# EAGLE board ll-tester (EAGLE 9.6.2)
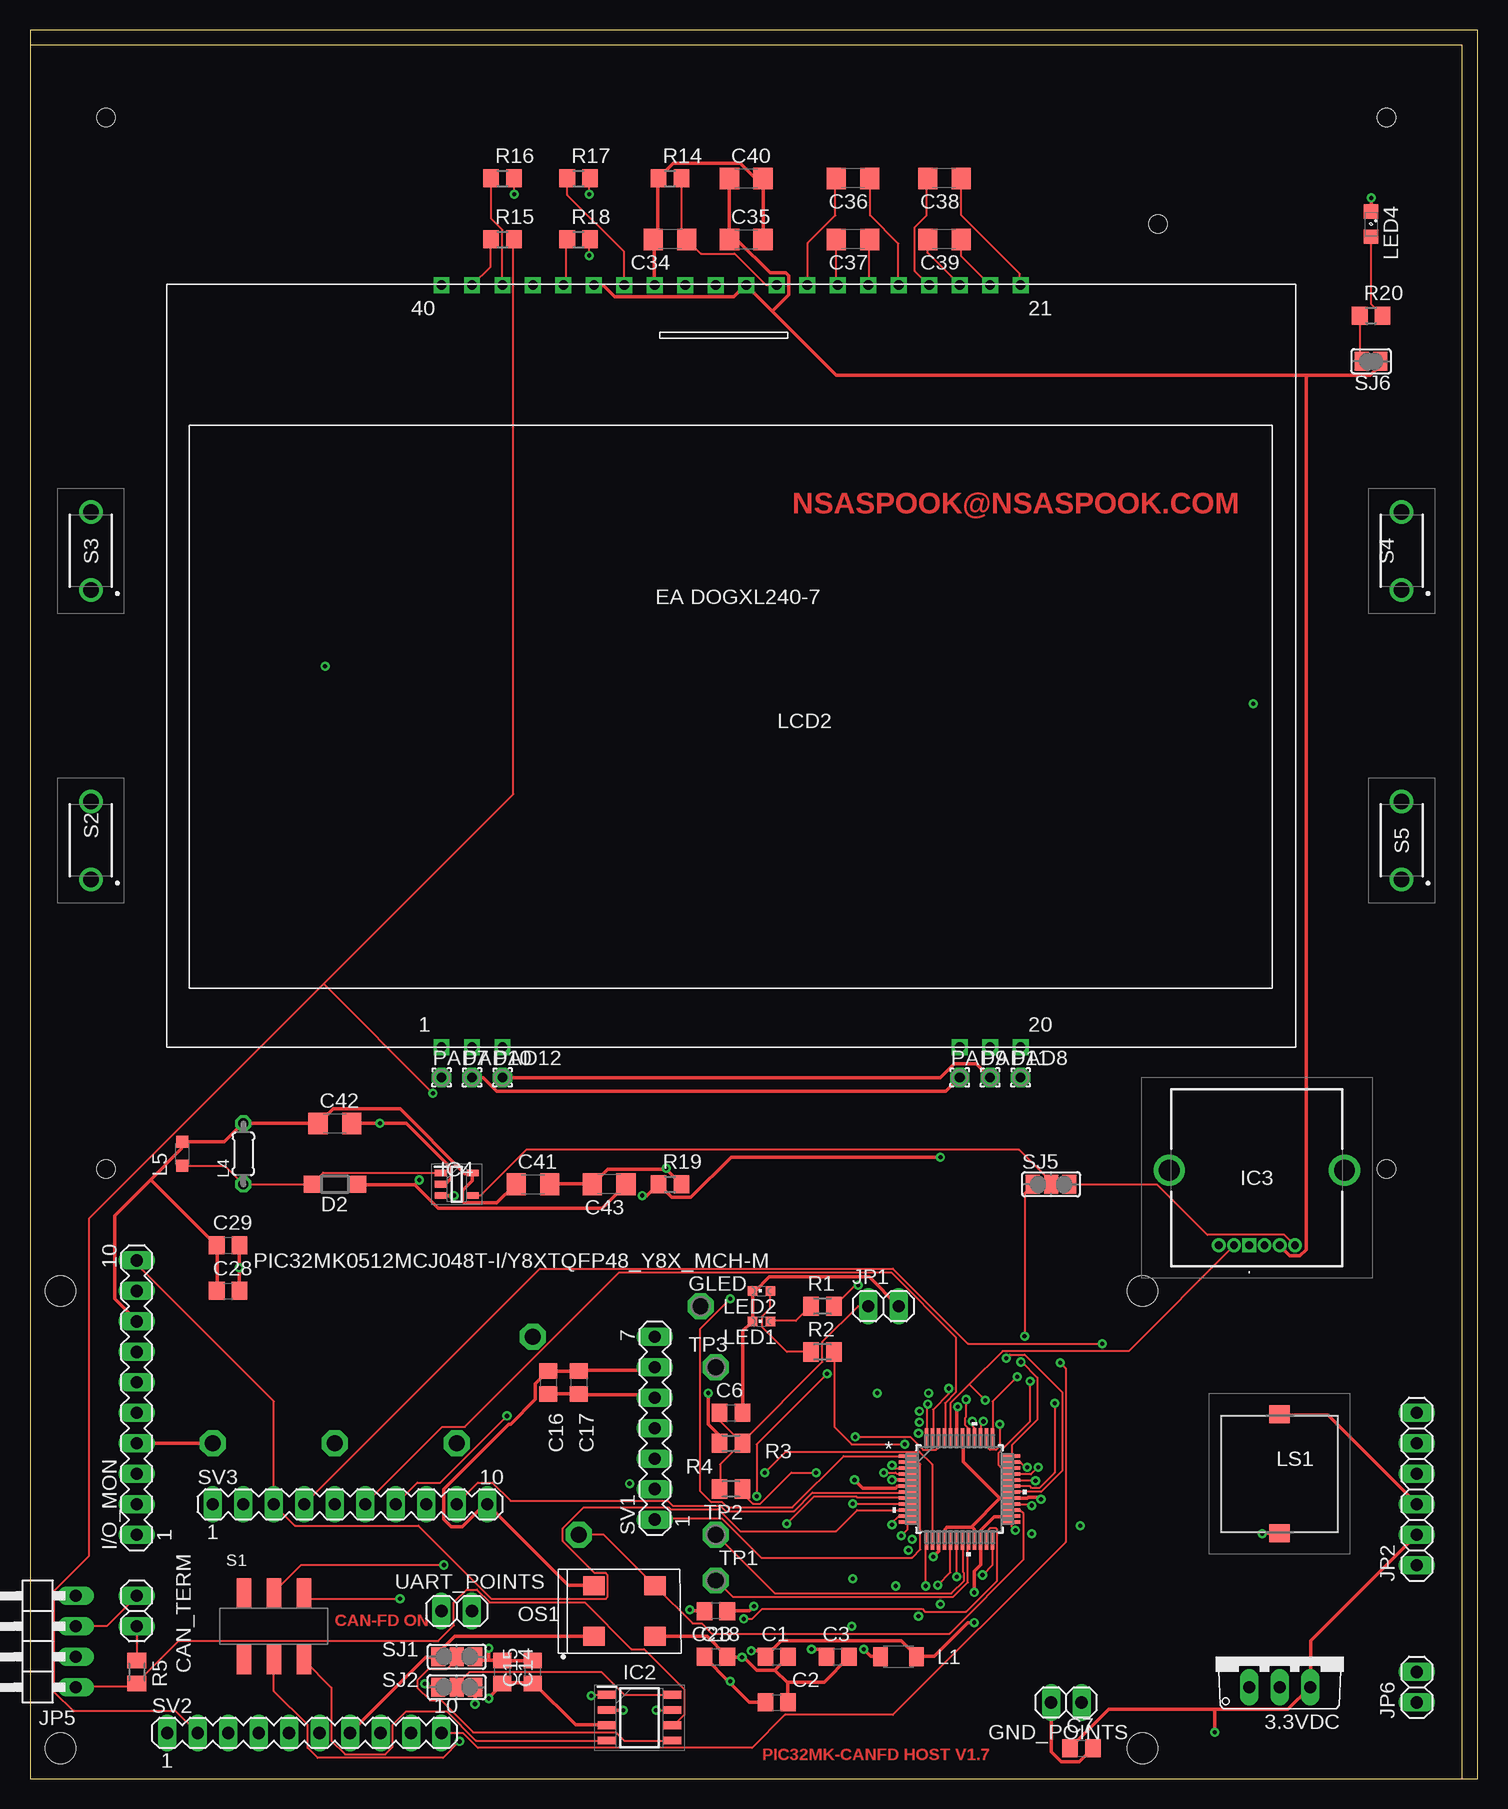
[diagram p0: board, top side]
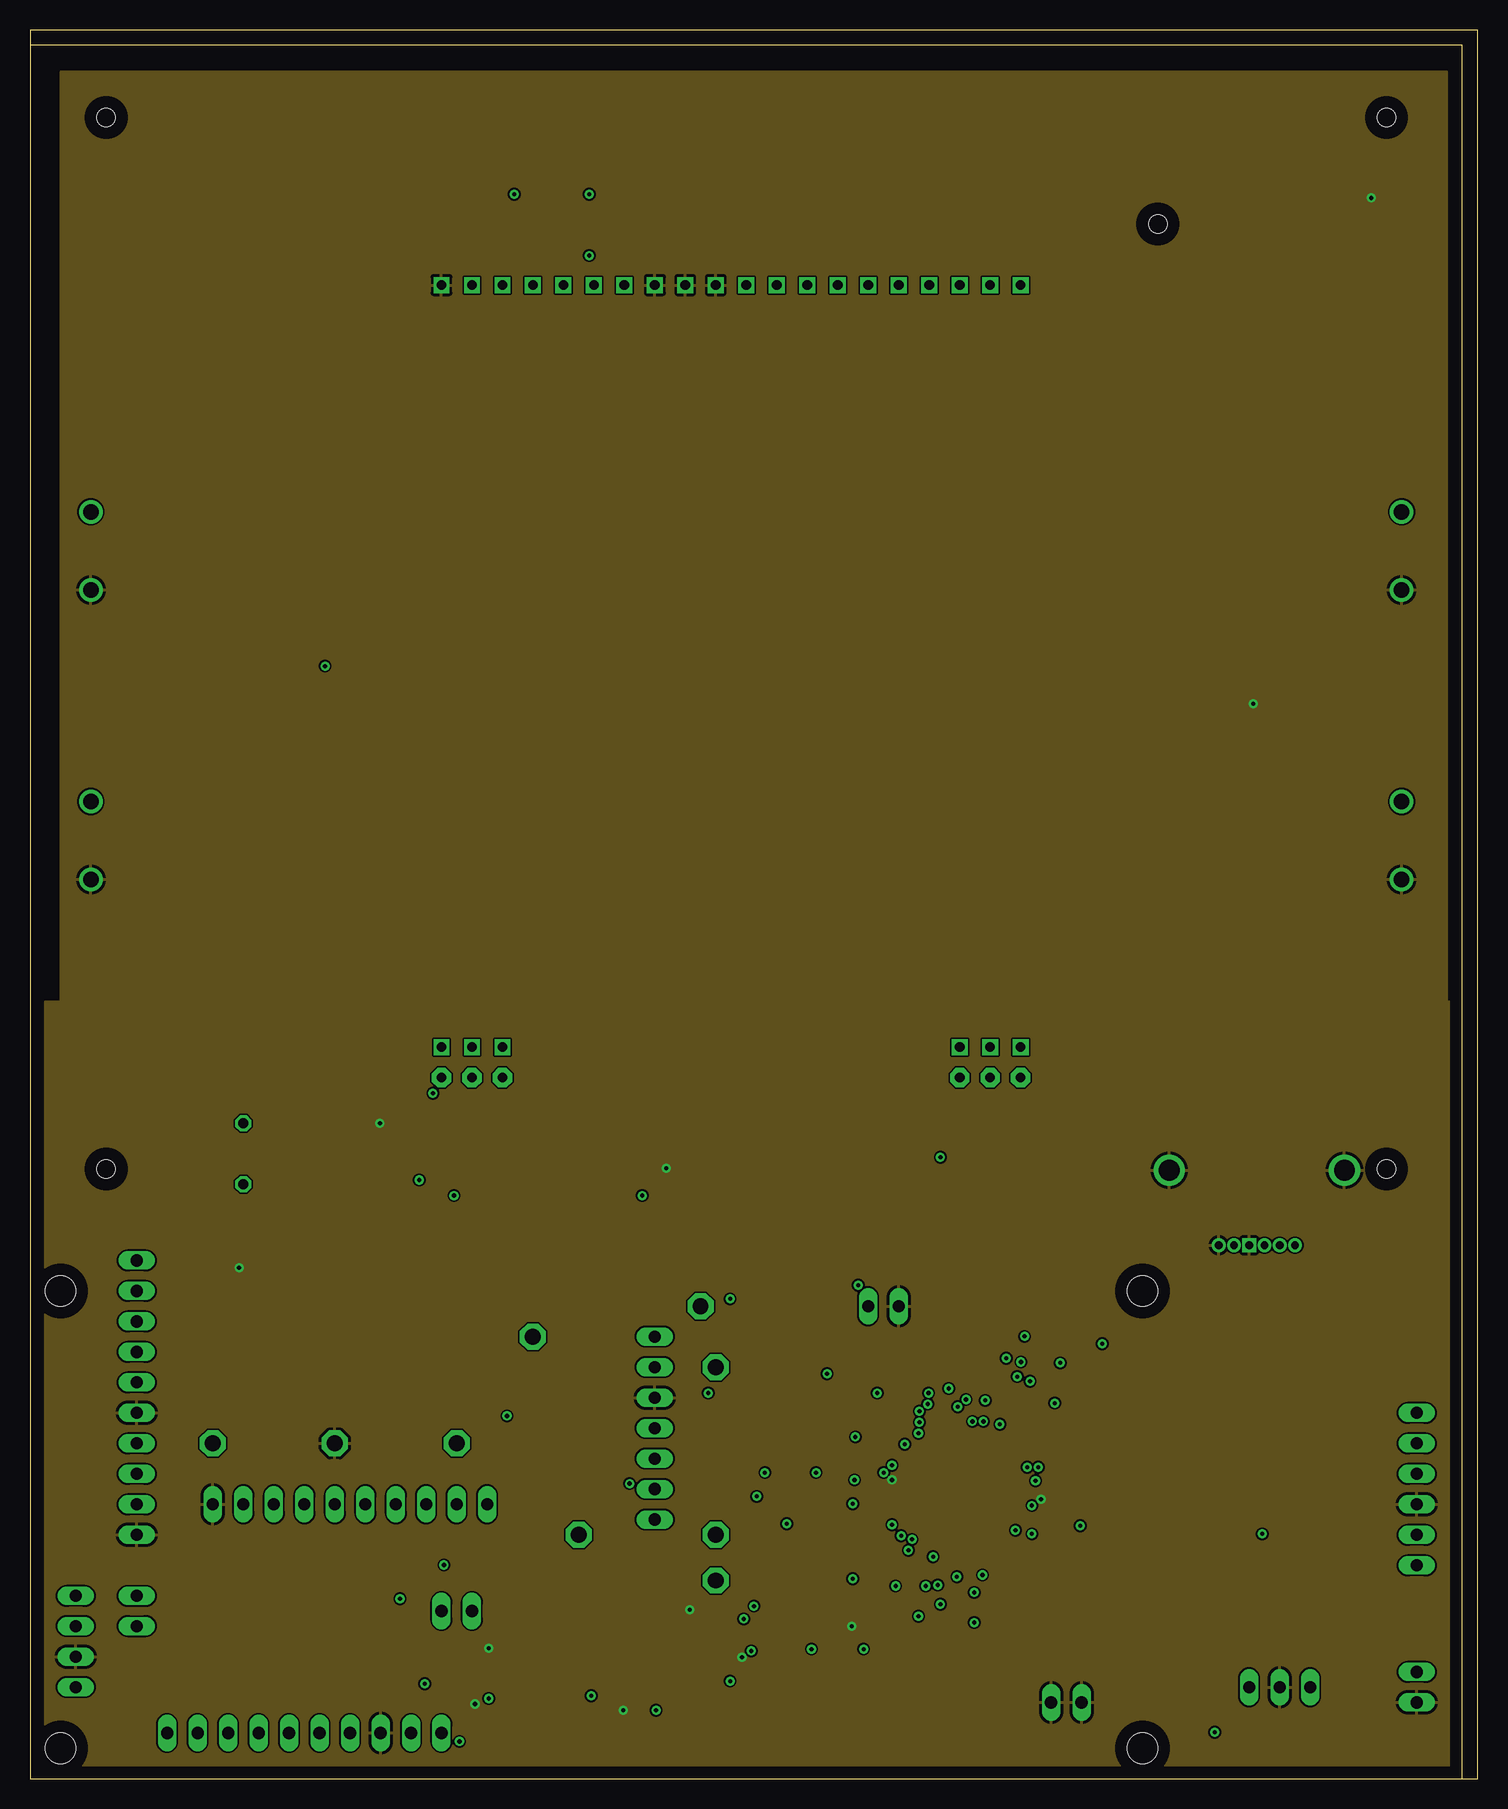
[diagram p1: board, inner layer Route2]
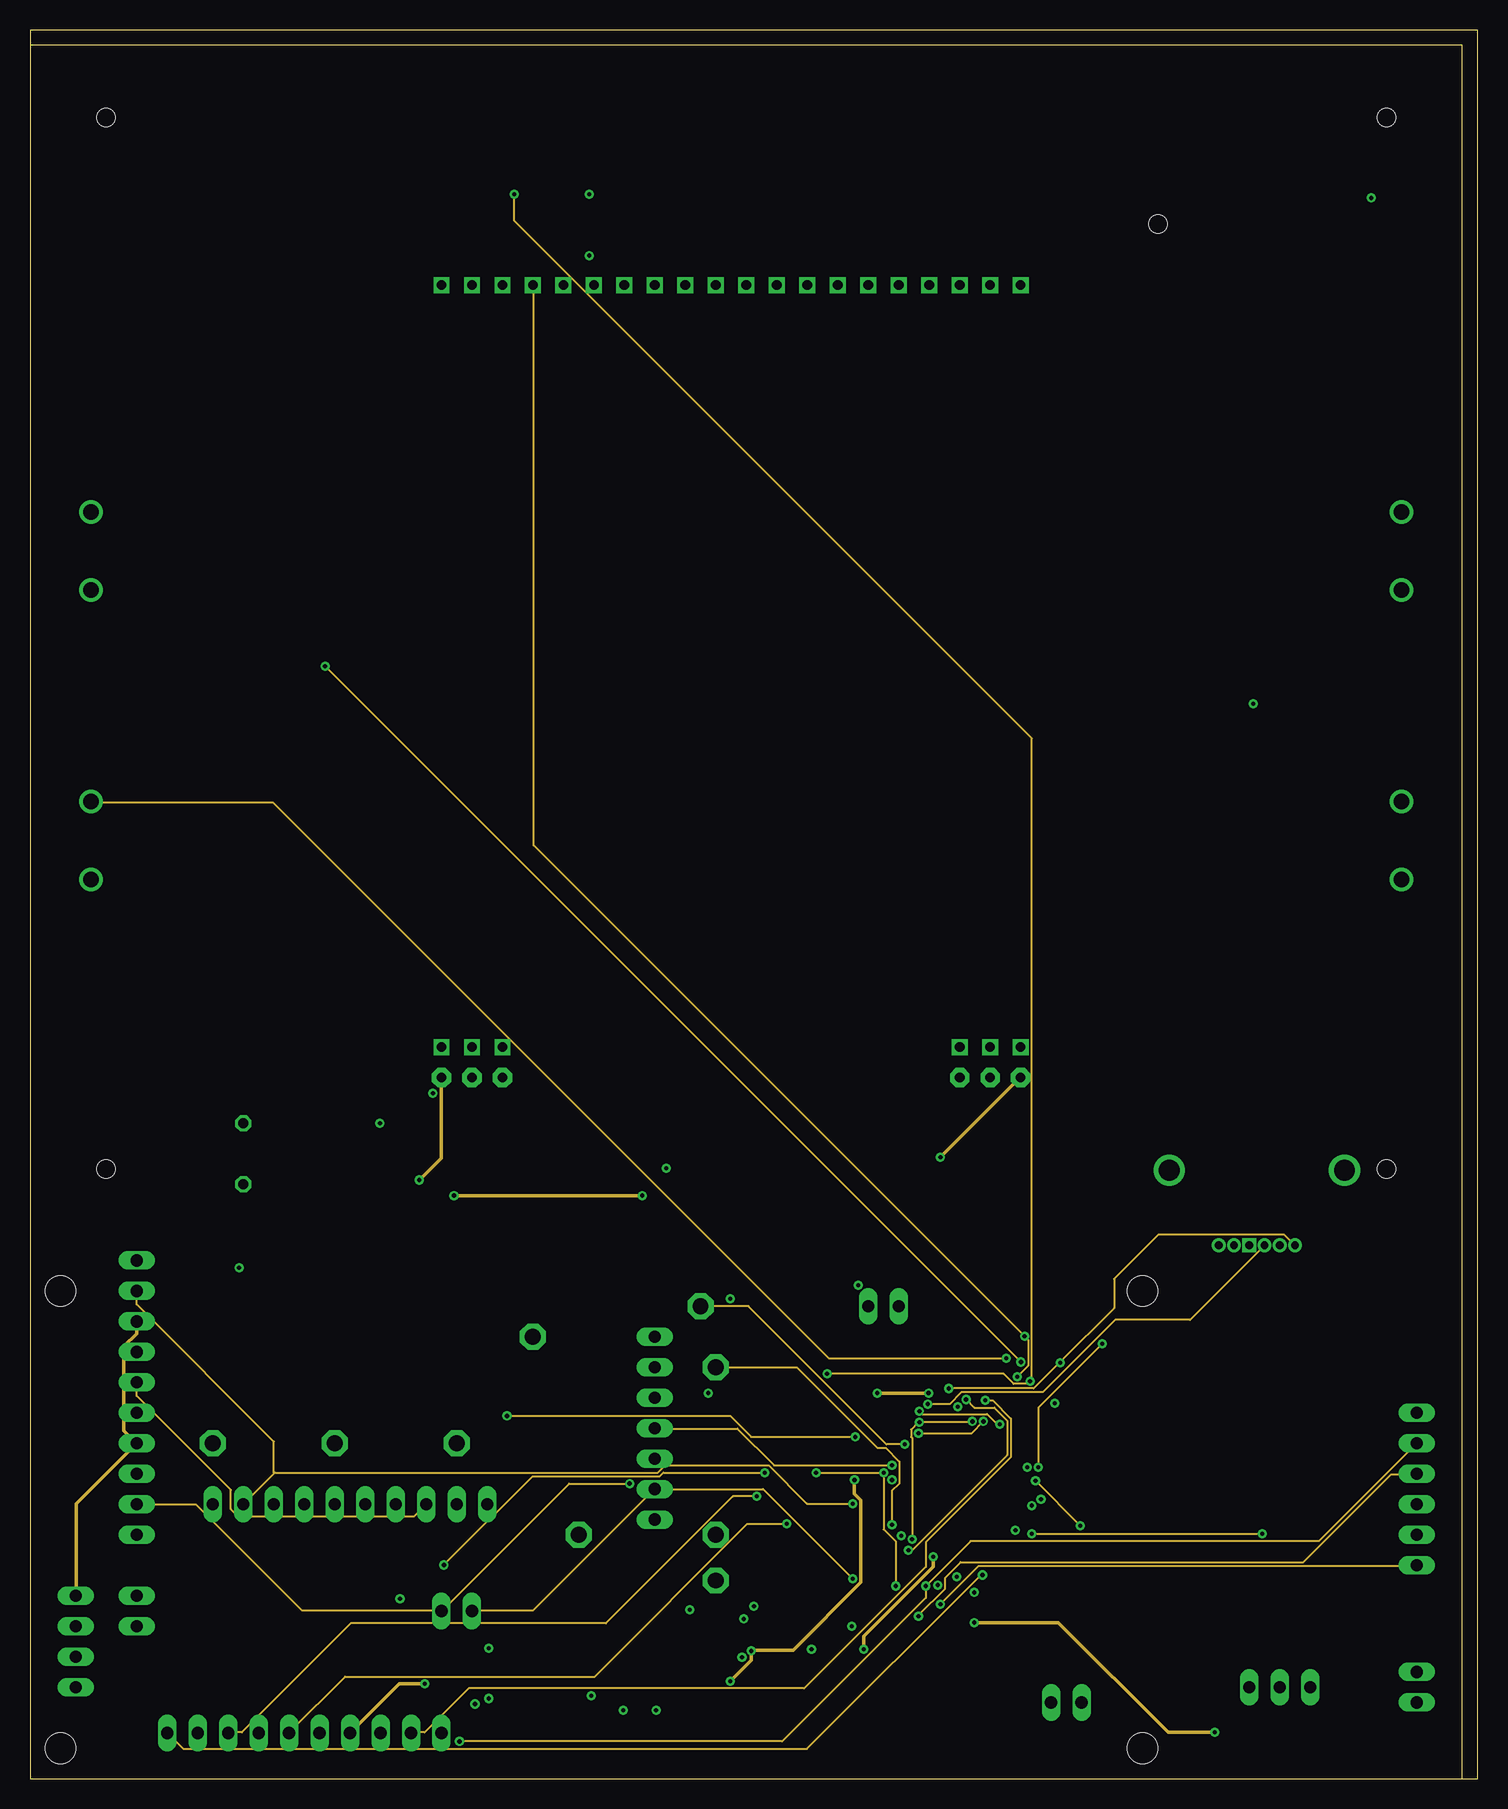
[diagram p2: board, inner layer Route15]
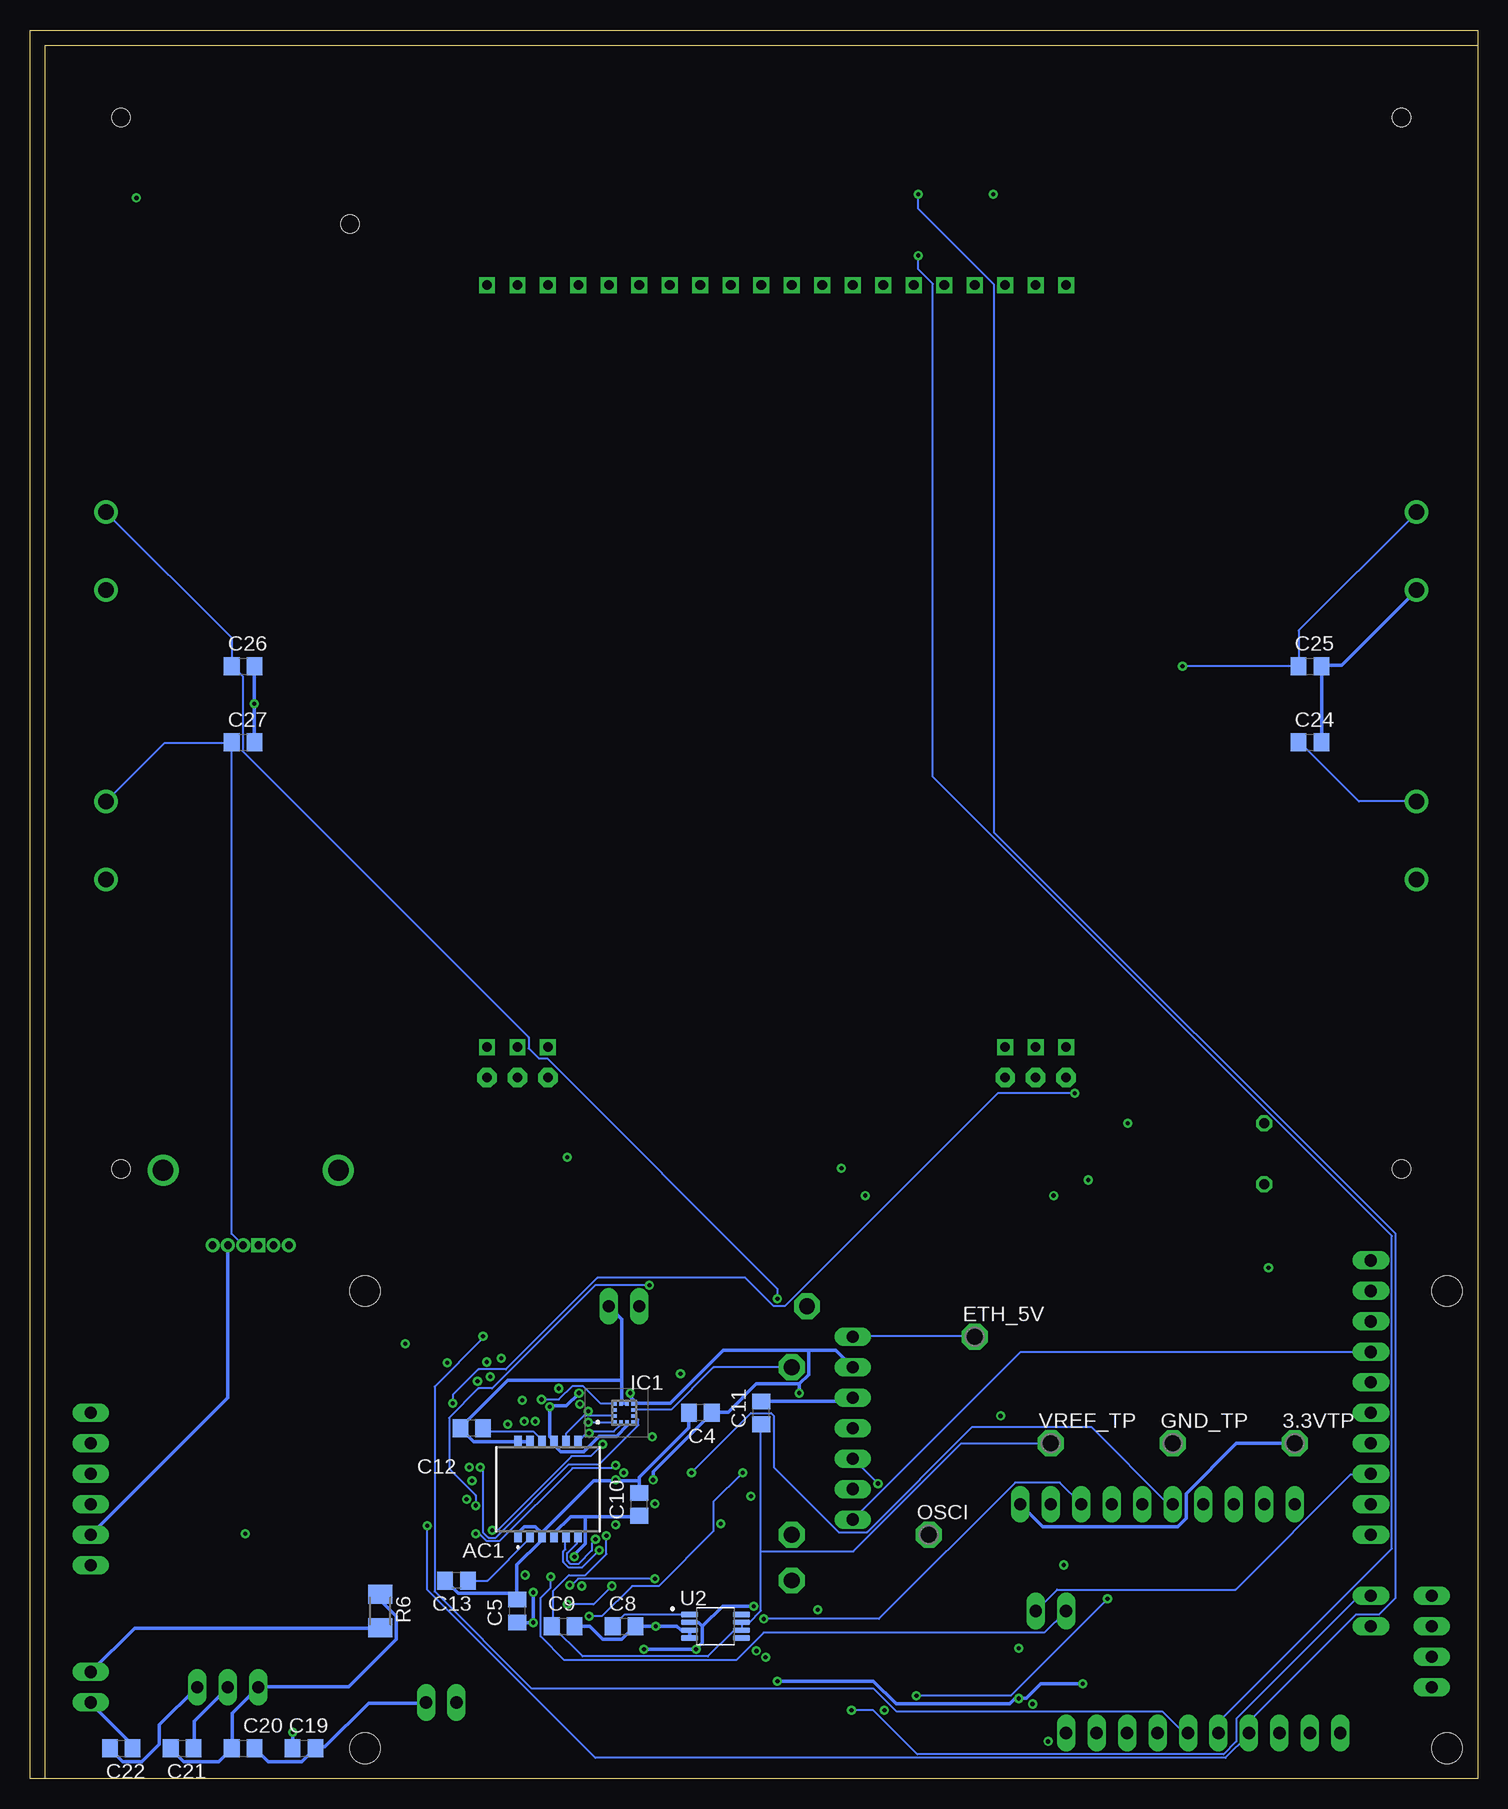
[diagram p3: board, bottom side, seen from below]

Size 120.63 x 145.72 mm. Coordinates in mm from the lower left corner, seen from the top.
Outline: 119.36,0 120.63,0 120.63,145.72 0,145.72 0,144.45
Outline: 119.36,0 0,0 0,144.45
Outline: 119.36,0 119.36,144.45 0,144.45
Copper layers (1+2*15+16): Top 0.035mm / dielectric 1.5mm / Route2 0.035mm / dielectric 0.15mm / Route15 0.035mm / dielectric 0.2mm / Bottom 0.035mm
Design rules "default *": minimum track width 6mil, minimum drill 0.35mm, track to track 6mil, track to pad 6mil, pad to pad 6mil, via to via 6mil, smd to smd 6mil, copper to edge 40mil, drill to drill 6mil, minimum pad ring 10mil, minimum via ring 8mil, stop-mask expansion 4mil, vias tented up to drill 0mil, thermal gap 10mil
Net classes: 1 icurrent: width 0.305 mm; 2 led: width 0.305 mm; 3 diff_can: width 0.051 mm
Holes 2.54 mm at 2.54,2.54 2.54,40.64 92.71,40.64 92.71,2.54
Holes 1.52 mm at 6.35,138.43 113.03,138.43 113.03,50.8 6.35,50.8 93.98,129.54
vRestrict: area 73.7,20.3 to 81.3,27.9; area 69.8,29.2 to 72.4,31.8; area 62.2,11.4 to 64.8,14; area 16.5,8.9 to 24.1,16.5

## Footprints (pad centres in the part's own frame; a part is rotated, then mirrored left to right if it is on the bottom)
TO220V = drill 1.016 long: 1 -2.54,-2.54; 2 0,-2.54; 3 2.54,-2.54
P1-13 = drill 1.321 pad 2.159 octagon: TP 0,0
SCA3300 = smd 0.61 x 0.98: 1 -2.5,-3.935; 2 -1.5,-3.935; 3 -0.5,-3.935; 4 0.5,-3.935; 5 1.5,-3.935; 6 2.5,-3.935; 7 2.5,3.935; 8 1.5,3.935; 9 0.5,3.935; 10 -0.5,3.935; 11 -1.5,3.935; 12 -2.5,3.935
C0805 = smd 1.3 x 1.5: 1 -0.95,0; 2 0.95,0
C1206 = smd 1.6 x 1.8: 1 -1.4,0; 2 1.4,0
1X02 = drill 1.016 long: 1 -1.27,0; 2 1.27,0
SOD123 = smd 1.4 x 1.4: A 1.9,0; C -1.9,0
MA10-1 = drill 1.016 long: 1 -11.43,0; 2 -8.89,0; 3 -6.35,0; 4 -3.81,0; 5 -1.27,0; 6 1.27,0; 7 3.81,0; 8 6.35,0; 9 8.89,0; 10 11.43,0
BMA490L = smd 0.3 x 0.35: 1 -0.75,-0.775; 2 -0.25,-0.775; 3 0.25,-0.775; 4 0.75,-0.775; 7 0.75,0.775; 8 0.25,0.775; 9 -0.25,0.775; 10 -0.75,0.775 | smd 0.35 x 0.3: 5 0.775,-0.25; 6 0.775,0.25; 11 -0.775,0.25; 12 -0.775,-0.25
SOIC127P600X175-8N = smd 1.528 x 0.65: 1 -2.711,1.905; 2 -2.711,0.635; 3 -2.711,-0.635; 4 -2.711,-1.905; 5 2.711,-1.905; 6 2.711,-0.635; 7 2.711,0.635; 8 2.711,1.905
EM14R0DR20L064S = drill 0.64 pad 1.1 square: 1 0,0 | drill 0.64 pad 1.1: 2 1.27,0; 3 2.54,0; 4 -2.54,0; A1 -1.27,0; B1 3.81,0 | drill 1.73 pad 2.595: MH1 -6.67,6.25; MH2 7.94,6.25
SOT95P280X100-5N = smd 1.05 x 0.55: 1 -1.3,0.95; 2 -1.3,0; 3 -1.3,-0.95; 4 1.3,-0.95; 5 1.3,0.95
1X06 = drill 1.016 long: 1 -6.35,0; 2 -3.81,0; 3 -1.27,0; 4 1.27,0; 5 3.81,0; 6 6.35,0
1X04/90 = drill 1.016 long: 1 -3.81,-3.81; 2 -1.27,-3.81; 3 1.27,-3.81; 4 3.81,-3.81
L3216C = smd 1.2 x 1.6: 1 -1.5,0; 2 1.5,0
0204/5 = drill 0.813 octagon: 1 -2.54,0; 2 2.54,0
L2012C = smd 1 x 1: 1 -1,0; 2 1,0
EA_DOGXL240-7 = drill 0.813 square: 1 0,0; 2 2.54,0; 3 5.08,0; 18 43.18,0; 19 45.72,0; 20 48.26,0; 21 48.26,63.5; 22 45.72,63.5; 23 43.18,63.5; 24 40.64,63.5; 25 38.1,63.5; 26 35.56,63.5; 27 33.02,63.5; 28 30.48,63.5; 29 27.94,63.5; 30 25.4,63.5; 31 22.86,63.5; 32 20.32,63.5; 33 17.78,63.5; 34 15.24,63.5; 35 12.7,63.5; 36 10.16,63.5; 37 7.62,63.5; 38 5.08,63.5; 39 2.54,63.5; 40 0,63.5
CHIPLED_0603 = smd 0.8 x 0.8: A 0,-0.75; C 0,0.75
SML0805 = smd 1.2 x 1.2: A 1.05,0; C -1.05,0
CMI97050380SMTTR = smd 1.7 x 1.5: 1 0,-4.95; 2 0,4.95
7.2X5.2-4-PAD = smd 1.8 x 1.6: 1 -2.54,-2.1; 2 2.54,-2.1; 3 2.54,2.1; 4 -2.54,2.1
1,6/0,8 = drill 0.813 pad 1.6 octagon: 1 0,0
M0805 = smd 1.3 x 1.6: 1 -0.95,0; 2 0.95,0
M1206 = smd 1.6 x 2: 1 -1.4,0; 2 1.4,0
R0805 = smd 1.3 x 1.5: 1 -0.95,0; 2 0.95,0
SW_JS202011SCQN = smd 1.2 x 2.5: 1 -2.5,-2.75; 2 0,-2.75; 3 2.5,-2.75; 4 -2.5,2.75; 5 0,2.75; 6 2.5,2.75
PTS635SL50LFS = drill 1.3 pad 1.95: 1 0,0; 2 6.5,0
SJ_2 = smd 1.168 x 1.6: 1 -1.524,0; 2 0,0; 3 1.524,0
SJ = smd 1.168 x 1.6: 1 -0.762,0; 2 0.762,0
MA07-1 = drill 1.016 long: 1 -7.62,0; 2 -5.08,0; 3 -2.54,0; 4 0,0; 5 2.54,0; 6 5.08,0; 7 7.62,0
TQFP48_Y8X_MCH-M = smd 1.549 x 0.279: 1 -4.28,2.75; 2 -4.28,2.25; 3 -4.28,1.75; 4 -4.28,1.25; 5 -4.28,0.75; 6 -4.28,0.25; 7 -4.28,-0.25; 8 -4.28,-0.75; 9 -4.28,-1.25; 10 -4.28,-1.75; 11 -4.28,-2.25; 12 -4.28,-2.75; 25 4.28,-2.75; 26 4.28,-2.25; 27 4.28,-1.75; 28 4.28,-1.25; 29 4.28,-0.75; 30 4.28,-0.25; 31 4.28,0.25; 32 4.28,0.75; 33 4.28,1.25; 34 4.28,1.75; 35 4.28,2.25; 36 4.28,2.75 | smd 0.279 x 1.549: 13 -2.75,-4.28; 14 -2.25,-4.28; 15 -1.75,-4.28; 16 -1.25,-4.28; 17 -0.75,-4.28; 18 -0.25,-4.28; 19 0.25,-4.28; 20 0.75,-4.28; 21 1.25,-4.28; 22 1.75,-4.28; 23 2.25,-4.28; 24 2.75,-4.28; 37 2.75,4.28; 38 2.25,4.28; 39 1.75,4.28; 40 1.25,4.28; 41 0.75,4.28; 42 0.25,4.28; 43 -0.25,4.28; 44 -0.75,4.28; 45 -1.25,4.28; 46 -1.75,4.28; 47 -2.25,4.28; 48 -2.75,4.28
SOP65P490X110-8N = smd 1.42 x 0.47: 1 -2.165,0.975; 2 -2.165,0.325; 3 -2.165,-0.325; 4 -2.165,-0.975; 5 2.165,-0.975; 6 2.165,-0.325; 7 2.165,0.325; 8 2.165,0.975

## Placement (x,y rotation side)
3.3VDC  3.3 Vreg  [TO220V]  104.14,10.16 0 top
3.3VTP  PTR1PAD1-13  [P1-13]  15.24,27.94 0 bottom
AC1  SCA3300-D01-1  [SCA3300]  77.47,24.13 0 bottom
C1  0.1uf  [C0805]  62.23,10.16 0 top
C2  10uf  [C0805]  62.23,6.35 0 top
C3  0.1uf  [C0805]  67.31,10.16 0 top
C4  0.1uf  [C0805]  64.77,30.48 180 bottom
C5  0.1uf  [C0805]  80.01,13.97 90 bottom
C6  0.1uf  [C0805]  58.42,30.48 0 top
C7  10uf  [C0805]  87.63,2.54 0 top
C8  0.1uf  [C0805]  71.12,12.7 0 bottom
C9  0.1uf  [C0805]  76.2,12.7 0 bottom
C10  0.1uf  [C0805]  69.85,22.86 90 bottom
C11  10uf  [C0805]  59.69,30.48 90 bottom
C12  0.01uf  [C0805]  83.82,29.21 180 bottom
C13  0.01uf  [C0805]  85.09,16.51 180 bottom
C14  10uf  [C0805]  39.37,8.89 90 top
C15  0.1uf  [C0805]  41.91,8.89 90 top
C16  10uf  [C0805]  43.18,33.02 270 top
C17  0.1uf  [C0805]  45.72,33.02 270 top
C18  0.1uf  [C0805]  57.15,10.16 0 top
C19  0.1uf  [C0805]  97.79,2.54 0 bottom
C20  0.1uf  [C0805]  102.87,2.54 0 bottom
C21  10uf  [C0805]  107.95,2.54 0 bottom
C22  10uf  [C0805]  113.03,2.54 0 bottom
C23  10uf  [C0805]  57.15,13.97 180 top
C24  0.1uf  [C0805]  13.97,86.36 0 bottom
C25  0.1uf  [C0805]  13.97,92.71 0 bottom
C26  0.1uf  [C0805]  102.87,92.71 0 bottom
C27  0.1uf  [C0805]  102.87,86.36 0 bottom
C28  0.1uf  [C0805]  16.51,40.64 0 top
C29  10uf  [C0805]  16.51,44.45 0 top
C34  0.047  [C1206]  53.34,128.27 180 top
C35  0.1  [C1206]  59.69,128.27 0 top
C36  4.7uf  [C1206]  68.58,133.35 180 top
C37  4.7uf  [C1206]  68.58,128.27 180 top
C38  4.7uf  [C1206]  76.2,133.35 180 top
C39  4.7uf  [C1206]  76.2,128.27 180 top
C40  10uf  [C1206]  59.69,133.35 0 top
C41  10uf  [C1206]  41.91,49.53 0 top
C42  0.1  [C1206]  25.4,54.61 0 top
C43  0.1  [C1206]  48.26,49.53 180 top
CAN_TERM  can term  [1X02]  8.89,13.97 270 top
D2  MBR0520LT  [SOD123]  25.4,49.53 180 top
ETH_5V  PTR1PAD1-13  [P1-13]  41.91,36.83 0 bottom
GLED  PTR1PAD1-13  [P1-13]  55.88,39.37 0 top
GND_POINTS  GND_TEST  [1X02]  86.36,6.35 180 top
GND_TP  PTR1PAD1-13  [P1-13]  25.4,27.94 0 bottom
I/O_MON  IOMON  [MA10-1]  8.89,31.75 90 top
IC1  BMA490L  [BMA490L]  71.12,30.48 0 bottom
IC2  TCAN330GD  [SOIC127P600X175-8N]  50.8,5.08 0 top
IC3  EM14R0D-R20-L064S  [EM14R0DR20L064S]  101.6,44.45 0 top
IC4  CAT4238TD-GT3  [SOT95P280X100-5N]  35.56,49.53 0 top
JP1  RESET_JMP  [1X02]  71.12,39.37 0 top
JP2  ICSP  [1X06]  115.57,24.13 90 top
JP5  CAN-FD  [1X04/90]  0,11.43 90 top
JP6  DC12+  [1X02]  115.57,7.62 90 top
L1  100uh  [L3216C]  72.39,10.16 0 top
L4  47uh  [0204/5]  17.78,52.07 90 top
L5  47uh  [L2012C]  12.7,52.07 90 top
LCD2  EA_DOGXL240-7  [EA_DOGXL240-7]  34.29,60.96 0 top
LED1  RED  [CHIPLED_0603]  60.96,38.1 90 top
LED2  GREEN  [CHIPLED_0603]  60.96,40.64 90 top
LED4  power  [SML0805]  111.76,129.54 270 top
LS1  CMI-9705-0380-SMT-TR  [CMI97050380SMTTR]  104.14,25.4 0 top
OS1  OSC-OE-CFPS-32  [7.2X5.2-4-PAD]  49.53,13.97 0 top
OSCI  PTR1PAD1-13  [P1-13]  45.72,20.32 0 bottom
PAD7  led+  [1,6/0,8]  34.29,58.42 0 top
PAD8  led-  [1,6/0,8]  82.55,58.42 0 top
PAD9  c1  [1,6/0,8]  77.47,58.42 0 top
PAD10  a2  [1,6/0,8]  36.83,58.42 0 top
PAD11  c2  [1,6/0,8]  80.01,58.42 0 top
PAD12  a3  [1,6/0,8]  39.37,58.42 0 top
R1  2k  [M0805]  66.04,39.37 0 top
R2  2k  [M0805]  66.04,35.56 0 top
R3  10k  [M0805]  58.42,27.94 180 top
R4  56  [M0805]  58.42,24.13 0 top
R5  120  [M0805]  8.89,8.89 90 top
R6  0 ohm fuse  [M1206]  91.44,13.97 270 bottom
R14  10m  [R0805]  53.34,133.35 0 top
R15  82.5  [R0805]  39.37,128.27 0 top
R16  82.5  [R0805]  39.37,133.35 0 top
R17  82.5  [R0805]  45.72,133.35 0 top
R18  82.5  [R0805]  45.72,128.27 0 top
R19  21.5  [R0805]  53.34,49.53 0 top
R20  1000  [R0805]  111.76,121.92 0 top
S1  JS202011SCQN  [SW_JS202011SCQN]  20.32,12.7 0 top
S2  PTS635SL50LFS  [PTS635SL50LFS]  5.08,74.93 90 top
S3  PTS635SL50LFS  [PTS635SL50LFS]  5.08,99.06 90 top
S4  PTS635SL50LFS  [PTS635SL50LFS]  114.3,99.06 90 top
S5  PTS635SL50LFS  [PTS635SL50LFS]  114.3,74.93 90 top
SJ1  can_shdn  [SJ_2]  35.56,10.16 0 top
SJ2  can_s  [SJ_2]  35.56,7.62 0 top
SJ5  LCD_blank  [SJ_2]  85.09,49.53 0 top
SJ6  PLED_ON  [SJ]  111.76,118.11 180 top
SV1  ETH1  [MA07-1]  52.07,29.21 90 top
SV2  GLCD  [MA10-1]  22.86,3.81 0 top
SV3  MISC0  [MA10-1]  26.67,22.86 0 top
TP1  PTR1PAD1-13  [P1-13]  57.15,16.51 0 top
TP2  PTR1PAD1-13  [P1-13]  57.15,20.32 0 top
TP3  PTR1PAD1-13  [P1-13]  57.15,34.29 0 top
U1  PIC32MK0512MCJ048T-I/Y8XTQFP48_Y8X_MCH-M  [TQFP48_Y8X_MCH-M]  77.47,24.13 0 top
U2  MAX6126B30  [SOP65P490X110-8N]  63.5,12.7 0 bottom
UART_POINTS  UART_TEST  [1X02]  35.56,13.97 0 top
VREF_TP  PTR1PAD1-13  [P1-13]  35.56,27.94 0 bottom

## Library data of the parts
3.3VDC = linear
3.3VTP ETH_5V GLED GND_TP OSCI TP1-TP3 VREF_TP = testpad
AC1 = SCA3300-D01-1; AVAILABILITY: In Stock; DESCRIPTION: Accelerometer X, Y, Z Axis ±1.5g, 3g, 6g - -; MF: Murata Electronics; MP: SCA3300-D01-1; PACKAGE: Nonstandard Murata; PRICE: None; PURCHASE-URL: https://pricing.snapeda.com/search/part/SCA3300-D01-1/?ref=eda
C1-C29 C34-C43 = rcl; SPICEPREFIX: C
CAN_TERM GND_POINTS JP1 JP2 JP5 JP6 UART_POINTS = pinhead
D2 = diode
I/O_MON SV1-SV3 = con-lstb; OC_FARNELL: unknown; OC_NEWARK: unknown
IC1 = SamacSys_Parts; DESCRIPTION: Accelerometers High-performance longevity acceleration sensor; HEIGHT: 1mm; MANUFACTURER_NAME: Bosch Sensortec; MANUFACTURER_PART_NUMBER: BMA490L; MOUSER_PART_NUMBER: 262-BMA490L; MOUSER_PRICE-STOCK: https://www.mouser.co.uk/ProductDetail/Bosch-Sensortec/BMA490L?qs=7MVldsJ5UawjTpioRTbJPQ%3D%3D
IC2 = TCAN330GD; DESCRIPTION: 3.3-V CAN Transceivers with CAN FD (Flexible Data Rate); HEIGHT: 1.75mm; MANUFACTURER_NAME: Texas Instruments; MANUFACTURER_PART_NUMBER: TCAN330GD; MOUSER_PART_NUMBER: 595-TCAN330GD; MOUSER_PRICE-STOCK: https://www.mouser.co.uk/ProductDetail/Texas-Instruments/TCAN330GD?qs=9DwIlvx97ae6H3qgocd9Aw%3D%3D
IC3 = EM14R0D-R20-L064S; DESCRIPTION: Optical Encoder Rotary Incremental Slot 0.011N.m Straight Digital Square Wave Through Hole PC Pin 16CPR; HEIGHT: 30.03mm; MANUFACTURER_NAME: Bourns; MANUFACTURER_PART_NUMBER: EM14R0D-R20-L064S
IC4 = CAT4238TD-GT3; ARROW_PART_NUMBER: CAT4238TD-GT3; ARROW_PRICE-STOCK: https://www.arrow.com/en/products/cat4238td-gt3/on-semiconductor; HEIGHT: 1mm; MANUFACTURER_NAME: ON Semiconductor; MANUFACTURER_PART_NUMBER: CAT4238TD-GT3; MOUSER_PART_NUMBER: 698-CAT4238TDG; MOUSER_PRICE-STOCK: https://www.mouser.co.uk/ProductDetail/ON-Semiconductor/CAT4238TD-GT3?qs=9dFQwQorgSxpbLptXYtgxg%3D%3D
L1 L4 L5 = rcl; SPICEPREFIX: L
LCD2 = ea_v66
LED1 LED2 LED4 = led
LS1 = CMI-9705-0380-SMT-TR; DESCRIPTION: 9.7 mm, 3 Vdc, 80 dB, Surface Mount, Driving Circuit, Magnetic Audio Indicator Buzzer; HEIGHT: 5.7mm; MANUFACTURER_NAME: CUI Devices; MANUFACTURER_PART_NUMBER: CMI-9705-0380-SMT-TR; MOUSER_PART_NUMBER: 490-CMI97050380SMTTR; MOUSER_PRICE-STOCK: https://www.mouser.co.uk/ProductDetail/CUI-Devices/CMI-9705-0380-SMT-TR?qs=P1JMDcb91o7eIePojyn4BA%3D%3D
OS1 = IQD-Frequency-Products
PAD7-PAD12 = wirepad
R1-R6 R14-R20 = rcl; SPICEPREFIX: R
S1 = JS202011SCQN_fixed; AVAILABILITY: Unavailable; DESCRIPTION: JS Series DPDT On-On Gull Wing Surface Mount Subminiature Slide Switch; MF: C&K; MP: JS202011SCQN; PACKAGE: None; PRICE: None
S2-S5 = PTS635SL50LFS; DESCRIPTION: Tactile Switches TACT; HEIGHT: 5mm; MANUFACTURER_NAME: C & K COMPONENTS; MANUFACTURER_PART_NUMBER: PTS635SL50LFS; MOUSER_PART_NUMBER: 611-PTS635SL50LFS; MOUSER_PRICE-STOCK: https://www.mouser.co.uk/ProductDetail/CK/PTS635SL50LFS?qs=u2NJ%252B70r0gpkXWlfBVOo5A%3D%3D
SJ1 SJ2 SJ5 SJ6 = jumper
U1 = 2022-08-07_22-50-41_Library; COPYRIGHT: Copyright (C) 2022 Ultra Librarian. All rights reserved.; MANUFACTURER_PART_NUMBER: PIC32MK0512MCJ048T-I/Y8X; MFR_NAME: Microchip
U2 = MAX6126B30; DESCRIPTION: Series Voltage Reference IC Fixed 3V V ±0.1% 10 mA 8-uMAX-EP|8-uSOP-EP; DIGI-KEY_PART_NUMBER: MAX6126B30+T-ND; MF: Maxim Integrated; MP: MAX6126B30+T; PACKAGE: MICRO MAX-8 Maxim; PURCHASE-URL: https://pricing.snapeda.com/search/part/MAX6126B30+T/?ref=eda

## Nets
AN0: I/O_MON.9 SV3.2 U1.9
AN1: I/O_MON.10 SV3.3 U1.10
AVDD [led]: AC1.4 C3.1 C10.1 C23.1 L1.1 U1.15 U2.2
BMA_INT2: IC1.6 TP3.TP U1.11
CAN_N [diff_can]: IC2.6 JP5.1 R5.1
CAN_P [diff_can]: CAN_TERM.1 IC2.7 JP5.3
DAC1: SV3.4 U1.33
DC_IN [icurrent]: JP6.2 R6.2
DC_INPUT [icurrent]: 3.3VDC.1 C20.1 C21.1 R6.1
DIS_CS: R18.2 SV2.5 U1.8
DIS_MODE: R17.2 SV2.4 U1.32
DIS_RESET: LCD2.37 SJ5.1 SV2.6 U1.37
EXT_INT2: IC1.5 U1.35
EXT_SW2: SV3.9 U1.7
GREEN_LED: GLED.TP R2.2 U1.25
IMU_CS: AC1.5 IC1.10 U1.41
INDX2: SV3.7 U1.46
MCLR_SIG: JP2.1 R4.2 SV3.5 U1.4
N$1: LED1.A R1.1
N$2: LED2.A R2.1
N$3: C6.1 JP1.1 R3.1 R4.1
N$4: C8.1 U2.1
N$5: TP1.TP U1.20
N$6: TP2.TP U1.19
N$7: AC1.10 C12.1
N$8: ETH_5V.TP SV1.7
N$9: AC1.2 C13.1
N$10: IC2.1 S1.6
N$11: IC2.4 S1.3
N$12: IC2.5 SJ1.2
N$13: IC2.8 SJ2.2
N$15: CAN_TERM.2 R5.2
N$44: C34.1 LCD2.29 R14.2
N$46: C36.1 LCD2.25
N$47: C36.2 LCD2.28
N$48: C37.1 LCD2.26
N$49: C37.2 LCD2.27
N$50: C38.1 LCD2.21
N$51: C38.2 LCD2.24
N$52: C39.1 LCD2.22
N$53: C39.2 LCD2.23
N$54: LCD2.36 R18.1
N$55: LCD2.34 R17.1
N$56: LCD2.38 R16.1
N$57: LCD2.39 R15.1
N$65: D2.A IC4.1 L4.1 L5.1
N$66 [led]: IC4.3 PAD8.1 R19.1
N$67 [led]: C43.1 D2.C PAD7.1
N$68 [led]: PAD9.1 PAD10.1
N$69 [led]: PAD11.1 PAD12.1
N$70: IC4.4 SJ5.2
N$71: R20.1 SJ6.2
N$72: LED4.A R20.2
OSC_MCU: OS1.3 OSCI.TP U1.27
PGC_C1RX: JP2.5 S1.2 U1.13
PGD_C1TX: JP2.4 S1.5 U1.14
QEA2: IC3.A1 SV2.9 U1.44
QEB2: IC3.B1 SJ5.3 SV2.10 U1.47
RA7: C26.1 S4.2 U1.1
RA10: C27.1 IC3.2 S5.2 U1.48
RB8: C25.1 S3.2 U1.36
RB11: SV3.6 U1.45
RB15: LS1.1 SV1.4 U1.3
RD8: C24.1 S2.2 U1.30
RED_LED: R1.2 U1.28
SCK1: R16.2 SV2.3 U1.34
SCK2: AC1.8 IC1.12 U1.38
SDI1: SV2.1 U1.24
SDI2: AC1.6 IC1.1 U1.40
SDO1: R15.2 SV2.2 U1.31
SDO2: AC1.7 IC1.2 U1.39
U1RX: I/O_MON.2 SV1.3 U1.18 UART_POINTS.1
U1TX: I/O_MON.3 SV1.2 U1.17 UART_POINTS.2
U2RX: I/O_MON.6 SV3.8 U1.23
U2TX: I/O_MON.7 SV1.1 U1.2
VDD [led]: 3.3VDC.3 3.3VTP.TP AC1.9 C1.1 C2.1 C4.1 C5.1 C7.1 C14.1 C15.1 C16.1 C17.1 C18.1 C19.1 C22.1 C28.1 C29.1 C35.1 C40.1 C41.1 C42.1 I/O_MON.4 I/O_MON.8 IC1.3 IC1.7 IC2.3 IC3.3 IC4.5 JP2.2 JP5.4 L1.2 L4.2 L5.2 LCD2.30 LCD2.35 OS1.1 OS1.4 R3.2 SJ1.1 SJ2.1 SJ6.1 SV1.6 SV2.7 SV3.10 U1.6 U1.22 U1.26 U1.43
VREF+: C9.1 C11.1 U1.12 U2.6 U2.7 VREF_TP.TP
VSS [led]: 3.3VDC.2 AC1.1 AC1.3 AC1.11 AC1.12 C1.2 C2.2 C3.2 C4.2 C5.2 C6.2 C7.2 C8.2 C9.2 C10.2 C11.2 C12.2 C13.2 C14.2 C15.2 C16.2 C17.2 C18.2 C19.2 C20.2 C21.2 C22.2 C23.2 C24.2 C25.2 C26.2 C27.2 C28.2 C29.2 C34.2 C35.2 C40.2 C41.2 C42.2 C43.2 GND_POINTS.1 GND_POINTS.2 GND_TP.TP I/O_MON.1 I/O_MON.5 IC1.8 IC1.9 IC2.2 IC3.1 IC3.4 IC3.MH1 IC3.MH2 IC4.2 JP1.2 JP2.3 JP5.2 JP6.1 LCD2.31 LCD2.32 LCD2.33 LCD2.40 LED1.C LED2.C LED4.C LS1.2 OS1.2 R14.1 R19.2 S2.1 S3.1 S4.1 S5.1 SJ1.3 SJ2.3 SV1.5 SV2.8 SV3.1 U1.5 U1.16 U1.21 U1.29 U1.42 U2.3 U2.4

## Tracks (layer width: path | path; a pad name or v marks a point on that pad's centre or on a via)
AN0  (via drill 0.35)
  Top 0.152: v68.56,22.91 73.13,22.91 U1.9
  Route15 0.152: v68.56,22.91 64.75,22.91 61.54,26.11 52.93,26.11 52.32,25.5 20.4,25.5 20.36,25.46 | 20.36,25.46 17.8,22.91 SV3.2 | I/O_MON.9 8.89,39.52 20.32,28.09 20.32,25.5 20.36,25.46
AN1
  Top 0.152: U1.10 73.13,22.38 68.94,22.38 67.18,20.62 59.18,20.62 57.35,22.45 53.39,22.45 53.24,22.61 46.15,22.61 44.4,20.85 44.4,19.79 47.07,17.12 47.98,17.12 48.13,16.97 48.13,15.14 47.98,14.99 38.46,14.99 32.36,21.08 22.07,21.08 20.32,22.84 SV3.3 20.32,31.45 8.89,42.88 I/O_MON.10
AVDD  (via drill 0.35)
  Top 0.305: v75.26,18.49 75.72,18.95 75.72,19.79 U1.15 | v65.13,10.79 65.73,10.79 66.34,10.18 C3.1 | v60.33,14.38 59.94,13.99 58.12,13.99 C23.1 | v69.47,10.79 70.08,10.18 70.84,10.18 L1.1
  Route15 0.305: v75.26,18.49 75.26,17.65 69.47,11.86 v69.47,10.79
  Bottom 0.305: 74.35,21.84 69.85,21.84 C10.1 | 74.35,21.84 75.56,21.84 76.94,20.47 76.94,20.24 AC1.4 | v75.26,18.49 75.26,18.64 74.35,19.56 74.35,21.84 | 64.59,12.7 64.9,13 65.66,13 U2.2 | 64.59,12.7 64.59,11.33 v65.13,10.79 v69.47,10.79 | v60.33,14.38 62.92,14.38 64.59,12.7
BMA_INT2  (via drill 0.35)
  Top 0.152: v71.83,21.16 71.83,21.31 72.37,21.84 73.13,21.84 U1.11
  Route15 0.152: v71.83,21.16 71.83,23.98 72.44,24.59 72.44,26.42 71.3,27.56 70.61,27.56 63.91,34.27 57.2,34.27 TP3.TP
  Bottom 0.152: IC1.6 70.31,30.76 67.18,30.76 63.68,34.27 57.2,34.27 TP3.TP
CAN_N
  Top 0.152: IC2.6 53.54,4.47 53.7,4.47 54.53,5.31 54.53,7.44 51.18,10.79 50.11,10.79 46.23,14.68 38.3,14.68 37.24,15.75 36.4,15.75 35.33,14.68 35.33,12.78 34.04,11.48 12.4,11.48 8.89,7.98 R5.1 8.89,7.9 8.66,7.67 3.86,7.67 JP5.1
CAN_P  (via drill 0.35)
  Top 0.152: v52.17,5.69 53.47,5.69 IC2.7 | JP5.3 6.38,12.7 8.89,15.21 CAN_TERM.1
  Bottom 0.152: v52.17,5.69 50.34,5.69 46.69,2.03 21.16,2.03 20.09,3.1 20.09,5 9.88,15.21 8.89,15.21 CAN_TERM.1
DAC1  (via drill 0.35)
  Top 0.152: v84.02,25.96 83.41,25.35 81.81,25.35 U1.33 | v89.36,36.25 78.16,36.25 71.91,42.49 42.49,42.49 SV3.4
  Route15 0.152: v84.02,25.96 84.02,30.91 v89.36,36.25
DC_IN
  Bottom 0.305: JP6.2 111.91,12.55 91.49,12.55 R6.2
DC_INPUT
  Bottom 0.305: C21.1 108.86,2.49 107.8,1.42 104.9,1.42 103.91,2.41 C20.1 103.76,2.56 103.76,5.46 3.3VDC.1 101.47,7.67 94.08,7.67 90.12,11.63 90.12,13.54 91.41,14.83 91.41,15.37 R6.1
DIS_CS  (via drill 0.35)
  Top 0.152: v46.61,126.92 46.61,128.22 R18.2 | v63.07,21.23 65.35,23.52 68.86,23.52 68.94,23.44 73.13,23.44 U1.8
  Route15 0.152: v63.07,21.23 59.79,21.23 47.07,8.51 26.26,8.51 21.62,3.86 SV2.5
  Bottom 0.152: v46.61,126.92 46.61,125.78 45.39,124.56 45.39,83.49 7.14,45.24 7.14,19.18 21.54,4.77 21.54,3.86 SV2.5
DIS_MODE  (via drill 0.35)
  Top 0.152: v46.61,132.03 46.61,133.32 R17.2 | v83.8,24.82 81.81,24.82 U1.32
  Route15 0.152: v87.53,21.08 v83.8,24.82
  Bottom 0.152: v46.61,132.03 46.61,130.81 40.28,124.48 40.28,78.84 6.83,45.39 6.83,15.06 8.2,13.69 10.11,13.69 19.02,4.77 19.02,3.86 SV2.4 19.1,3.79 19.1,3.63 21.01,1.73 73.51,1.73 87.53,15.75 v87.53,21.08
DIS_RESET  (via drill 0.35)
  Top 0.152: v82.27,33.5 80.21,31.45 80.21,28.47 U1.37 | v82.88,36.85 82.88,48.82 83.57,49.5 SJ5.1
  Route15 0.152: v82.27,33.5 83.19,34.42 83.19,36.55 v82.88,36.85 41.96,77.78 41.96,124.41 LCD2.37
  Bottom 0.152: v82.88,36.85 82.88,36.7 86.92,32.66 86.92,15.6 78.84,7.52 50.34,7.52 48.44,5.61 26.26,5.61 24.51,3.86 24.13,3.86 SV2.6
EXT_INT2  (via drill 0.35)
  Top 0.152: v83.11,25.96 82.96,25.96 82.58,26.34 81.81,26.34 U1.35
  Bottom 0.152: v83.11,25.96 82.88,25.73 82.88,20.55 82.42,20.09 81.81,20.09 75.72,26.19 73.2,26.19 69.93,29.46 69.93,29.92 70.23,30.23 70.31,30.23 IC1.5
EXT_SW2
  Top 0.152: U1.7 73.13,23.82 65.2,23.82 63.68,22.3 57.96,22.3 57.51,22.76 53.54,22.76 53.16,23.14 40.06,23.14 38.53,24.66 37.31,24.66 35.56,22.91 SV3.9
GREEN_LED  (via drill 0.35)
  Top 0.152: v82.12,20.7 81.81,21.01 81.81,21.31 U1.25 | v72.9,27.86 68.48,27.86 67.03,29.31 67.03,35.56 R2.2
  Route15 0.152: GLED.TP 59.87,39.37 71.37,27.86 v72.9,27.86
  Bottom 0.152: v82.12,20.7 81.66,20.7 75.49,26.87 73.89,26.87 v72.9,27.86
IMU_CS  (via drill 0.35)
  Top 0.152: v78,31.6 78,30.15 77.93,30.07 77.93,29.46 78.23,29.16 78.23,28.47 U1.41
  Route15 0.152: v73.2,19.02 73.51,19.02 81.43,26.95 81.43,29.84 80.37,30.91 78.69,30.91 v78,31.6
  Bottom 0.152: v78,31.6 76.56,31.6 75.41,32.74 74.57,32.74 73.13,31.29 71.91,31.29 IC1.10 | v73.2,19.02 74.65,17.58 75.72,17.58 76.17,18.03 76.17,18.95 76.02,19.1 76.02,20.17 AC1.5
INDX2  (via drill 0.35)
  Top 0.152: v68.78,28.47 73.36,28.47 74.42,27.41 75.49,27.41 75.72,27.63 75.72,28.4 U1.46 | v39.75,30.23 34.19,24.66 32.28,24.66 SV3.7
  Route15 0.152: v68.78,28.47 60.1,28.47 58.34,30.23 v39.75,30.23
MCLR_SIG  (via drill 0.35)
  Top 0.152: v71.14,25.5 72.14,25.5 72.21,25.42 73.13,25.42 U1.4 | v65.51,25.5 63.45,25.5 60.86,22.91 60.25,22.91 59.41,23.75 59.41,24.13 R4.2
  Route15 0.152: v65.51,25.5 v71.14,25.5 71.14,20.78 72.14,19.79 v72.14,16.05 | v75.87,14.53 79.07,17.73 115.57,17.73 JP2.1
  Bottom 0.152: v65.51,25.5 60.55,30.45 58.88,30.45 58.65,30.23 58.65,25.96 53.24,20.55 50.88,20.55 42.11,29.31 32.21,29.31 25.81,22.91 25.43,22.91 SV3.5 | v75.87,14.53 73.66,14.53 v72.14,16.05
N$1
  Top 0.152: LED1.A 61.77,38.15 63.83,38.15 65.05,39.37 R1.1
N$2
  Top 0.152: R2.1 63.07,35.56 61.01,37.62 61.01,38.53 61.7,39.22 61.7,40.59 LED2.A
N$3
  Top 0.152: C6.1 57.51,30.45 57.51,29.77 59.33,27.94 R3.1 | R4.1 57.51,24.13 57.51,26.19 59.26,27.94 R3.1 | JP1.1 69.01,39.37 66.04,36.4 66.04,34.72 59.33,28.02 R3.1
N$4
  Bottom 0.152: U2.1 65.73,13.69 71.07,13.69 C8.1
N$5
  Top 0.152: U1.20 78.16,19.79 78.16,16.36 76.94,15.14 58.57,15.14 57.2,16.51 TP1.TP
N$6
  Top 0.152: U1.19 77.78,19.79 77.78,17.2 77.85,17.12 77.85,16.51 76.78,15.44 62.08,15.44 57.2,20.32 TP2.TP
N$7
  Bottom 0.152: AC1.10 78,28.09 78,28.24 78.69,28.93 82.58,28.93 82.8,29.16 C12.1
N$8
  Bottom 0.152: SV1.7 52.02,36.85 41.96,36.85 ETH_5V.TP
N$9
  Bottom 0.152: C13.1 82.5,16.51 78.99,20.02 78.99,20.17 AC1.2
N$10  (via drill 0.35)
  Top 0.152: IC2.1 46.84,6.98 v46.76,6.91 | v30.84,14.99 23.29,14.99 22.84,15.44 S1.6
  Bottom 0.152: v46.76,6.91 38.91,6.91 v30.84,14.99
N$11
  Top 0.152: IC2.4 37.16,3.17 34.72,5.61 31.37,5.61 30.23,4.47 30.23,2.64 29.62,2.03 26.26,2.03 25.12,3.17 25.12,7.59 22.84,9.88 S1.3
N$12
  Top 0.152: IC2.5 49.51,3.17 48.82,3.86 36.93,3.86 34.27,6.53 33.35,6.53 32.28,7.59 32.28,8.2 33.2,9.12 34.72,9.12 35.56,9.96 SJ1.2
N$13
  Top 0.152: IC2.8 49.51,6.98 47.6,8.89 36.63,8.89 35.56,7.82 SJ2.2
N$15
  Top 0.152: CAN_TERM.2 R5.2
N$44
  Top 0.152: R14.2 54.3,133.32 54.3,128.68 54.69,128.29 C34.1 54.76,128.22 55.91,127.08 58.73,127.08 61.32,124.48 62.23,124.48 LCD2.29
N$46
  Top 0.152: C36.1 70,133.32 70,130.28 72.37,127.91 72.37,124.48 LCD2.25
N$47
  Top 0.152: C36.2 67.11,133.32 67.11,130.28 64.82,127.99 64.82,124.48 LCD2.28
N$48
  Top 0.152: C37.1 69.93,128.22 69.93,124.56 69.85,124.48 LCD2.26
N$49
  Top 0.152: C37.2 67.18,128.22 67.18,124.56 67.26,124.48 LCD2.27
N$50
  Top 0.152: C38.1 77.62,133.32 77.62,130.28 82.5,125.4 82.5,124.48 LCD2.21
N$51
  Top 0.152: C38.2 74.73,133.32 74.73,130.28 73.74,129.29 73.74,125.63 74.88,124.48 LCD2.24
N$52
  Top 0.152: LCD2.22 77.62,126.85 77.62,128.22 C39.1
N$53
  Top 0.152: C39.2 74.8,128.22 74.8,127.15 77.47,124.48 LCD2.23
N$54
  Top 0.152: LCD2.36 44.7,124.71 44.7,128.22 R18.1
N$55
  Top 0.152: R17.1 44.78,133.32 44.78,131.95 49.51,127.23 49.51,124.48 LCD2.34
N$56
  Top 0.152: LCD2.38 39.37,129.06 38.46,129.97 38.46,133.32 R16.1
N$57
  Top 0.152: LCD2.39 38.38,126.01 38.38,128.22 R15.1
N$65
  Top 0.152: L5.1 12.7,51.03 16.28,51.03 L4.1 17.8,49.5 23.44,49.5 D2.A 23.52,49.58 24.44,50.5 34.19,50.5 IC4.1
N$66  (via drill 0.35)
  Top 0.305: v35.33,48.59 IC4.3 | v51.03,48.59 51.41,48.59 52.32,49.5 R19.1 52.48,49.43 53.47,48.44 55.07,48.44 58.42,51.79 v75.87,51.79
  Route15 0.305: v51.03,48.59 v35.33,48.59 | v75.87,51.79 82.5,58.42 PAD8.1
N$67  (via drill 0.35)
  Top 0.305: 32.06,49.5 27.33,49.5 D2.C | 32.06,49.5 34.04,47.52 47.68,47.52 49.66,49.5 C43.1 | 32.06,49.5 v32.44,49.89
  Route15 0.305: v32.44,49.89 34.27,51.71 34.27,58.42 PAD7.1
N$68
  Top 0.305: PAD10.1 37.77,58.42 38.91,57.28 76.33,57.28 PAD9.1
N$69
  Top 0.305: PAD12.1 75.87,58.42 77.01,59.56 78.84,59.56 79.98,58.42 PAD11.1
N$70
  Top 0.152: SJ5.2 85.09,49.73 82.42,52.4 41.35,52.4 37.54,48.59 36.93,48.59 IC4.4
N$71
  Top 0.152: R20.1 110.85,121.9 110.85,118.31 111,118.16 SJ6.2
N$72
  Top 0.152: LED4.A 111.76,122.88 112.67,121.97 R20.2
OSC_MCU
  Top 0.152: U1.27 81.81,22.38 82.5,22.38 82.8,22.07 82.8,18.26 76.63,12.09 56.82,12.09 55.98,12.93 55.22,12.93 52.09,16.05 OS1.3 52.02,16.13 47.83,20.32 OSCI.TP
PGC_C1RX  (via drill 0.35)
  Top 0.152: v74.65,16.05 74.65,19.79 U1.13 | S1.2 20.32,7.29 23.14,4.47 23.14,2.56 23.98,1.73 34.42,1.73 v35.79,3.1
  Route15 0.152: JP2.5 107.42,19.79 78.38,19.79 v74.65,16.05 74.65,15.06 62.69,3.1 v35.79,3.1
PGD_C1TX  (via drill 0.35)
  Top 0.152: v61.24,25.5 62.99,27.25 74.12,27.25 75.18,26.19 75.18,19.86 U1.14 | v34.49,17.8 22.61,17.8 20.32,15.52 S1.5
  Route15 0.152: v61.24,25.5 52.78,25.5 52.48,25.2 41.89,25.2 v34.49,17.8 | v74.04,13.54 74.04,13.61 76.25,15.82 76.25,16.74 77.55,18.03 106.12,18.03 113.44,25.35 115.57,25.35 JP2.4
  Bottom 0.152: v74.04,13.54 72.97,13.54 70.46,16.05 68.25,16.05 63.68,20.62 63.68,23.06 v61.24,25.5
QEA2  (via drill 0.35)
  Top 0.152: 78.27,32.85 81.05,35.64 91.57,35.64 100.33,44.4 IC3.A1 | 78.27,32.85 76.71,31.29 76.71,28.47 U1.44 | 78.27,32.85 v79.6,31.52
  Route15 0.152: v79.6,31.52 80.21,31.52 81.74,30 81.74,26.8 74.65,19.71 74.65,17.65 64.52,7.52 36.55,7.52 32.89,3.86 31.75,3.86 SV2.9
QEB2  (via drill 0.35)
  Top 0.152: v76.56,32.51 76.56,32.05 75.26,30.76 75.26,28.47 U1.47 | SJ5.3 86.61,49.5 93.93,49.5 98.12,45.31 104.52,45.31 105.36,44.48 IC3.B1 | v85.85,34.65 86.31,34.19 86.31,19.71 71.91,5.31 62.92,5.31 60.17,2.56 37.31,2.56 36.09,3.79 34.34,3.79 SV2.10
  Route15 0.152: v76.56,32.51 83.64,32.51 85.81,34.68 | 85.81,34.68 90.35,39.22 90.35,41.66 94,45.31 104.52,45.31 105.36,44.48 IC3.B1 | v85.85,34.65 85.81,34.68
RA7  (via drill 0.35)
  Top 0.152: v58.34,39.98 55.83,37.46 55.83,23.98 56.74,23.06 57.66,23.06 58.12,22.61 63.53,22.61 67.79,26.87 73.13,26.87 U1.1
  Bottom 0.152: S4.2 114.28,105.51 103.84,95.07 103.84,92.71 C26.1 103.76,92.71 102.92,91.87 102.92,85.62 79.07,61.77 79.07,60.86 78.23,60.02 77.55,60.02 58.34,40.82 v58.34,39.98
RA10  (via drill 0.35)
  Top 0.152: v74.8,31.22 74.73,31.14 74.73,28.47 U1.48
  Route15 0.152: v74.8,31.22 76.63,31.22 77.62,32.21 84.4,32.21 90.42,38.23 96.67,38.23 102.84,44.4 IC3.2
  Bottom 0.152: S5.2 114.28,81.43 109.4,86.31 103.84,86.31 C27.1 103.84,86.23 103.84,45.39 102.92,44.48 IC3.2
RB8  (via drill 0.35)
  Top 0.152: v82.58,34.72 82.65,34.72 83.95,33.43 83.95,29.92 81.81,27.79 81.81,26.95 U1.36
  Route15 0.152: v24.59,92.71 v82.58,34.72
  Bottom 0.152: S3.2 5.08,105.51 14.91,95.68 C25.1 v24.59,92.71
RB11
  Top 0.152: U1.45 76.25,28.47 76.25,31.29 77.17,32.21 77.17,36.78 71.75,42.19 49.12,42.19 36.25,29.31 34.34,29.31 27.94,22.91 SV3.6
RB15  (via drill 0.35)
  Top 0.152: v71.83,26.11 72.06,25.88 73.13,25.88 U1.3 | v102.69,20.4 104.14,20.4 LS1.1
  Route15 0.152: v71.83,26.11 62,26.11 58.95,29.16 52.09,29.16 SV1.4 | v83.49,20.4 v102.69,20.4
  Bottom 0.152: v83.49,20.4 83.19,20.4 82.58,19.79 81.51,19.79 75.41,25.88 72.06,25.88 v71.83,26.11
RD8  (via drill 0.35)
  Top 0.152: v81.36,35.03 81.66,35.33 82.88,35.33 86,32.21 86,25.65 84.25,23.9 81.81,23.9 U1.30
  Route15 0.152: v81.36,35.03 66.57,35.03 20.24,81.36 5.08,81.36 S2.2
  Bottom 0.152: C24.1 14.91,86.31 14.76,86.31 9.88,81.43 S2.2
RED_LED  (via drill 0.35)
  Top 0.152: v83.49,22.76 83.41,22.84 81.81,22.84 U1.28 | v69.01,41.12 68.78,41.12 67.03,39.37 R1.2
  Bottom 0.152: v83.49,22.76 83.49,23.6 85.7,25.81 85.7,30.07 83.26,32.51 82.12,32.51 73.51,41.12 v69.01,41.12
SCK1  (via drill 0.35)
  Top 0.152: v40.36,132.03 40.36,133.32 R16.2 | v83.34,33.12 83.34,29.77 80.75,27.18 80.75,26.11 80.97,25.88 81.74,25.88 U1.34 | v60.55,23.52 60.55,27.86 v66.42,33.73
  Route15 0.152: v40.36,132.03 40.36,129.82 83.49,86.69 83.49,33.27 v83.34,33.12 83.11,32.89 81.97,32.89 81.13,33.73 v66.42,33.73 | v60.55,23.52 58.57,23.52 47.98,12.93 26.72,12.93 17.65,3.86 16.51,3.86 SV2.3
SCK2  (via drill 0.35)
  Top 0.152: v80.82,29.54 80.82,27.71 80.52,27.41 79.98,27.41 79.76,27.63 79.76,28.4 U1.38
  Route15 0.152: v80.82,29.54 80.59,29.54 79.76,30.38 74.35,30.38 v74.12,30.61
  Bottom 0.152: 74.12,30.3 74.42,30.3 75.95,28.78 75.95,28.09 AC1.8 | 74.12,30.3 71.91,30.3 IC1.12 | 74.12,30.3 v74.12,30.61
SDI1  (via drill 0.35)
  Top 0.152: v79.38,16.97 80.21,17.8 80.21,19.79 U1.24
  Route15 0.152: v79.38,16.97 79.22,16.97 64.75,2.49 12.78,2.49 11.48,3.79 SV2.1
SDI2  (via drill 0.35)
  Top 0.152: v78.54,29.77 78.54,29.39 78.69,29.23 78.69,28.47 U1.40
  Route15 0.152: v78.54,29.77 78.46,29.69 v74.12,29.69 74.04,29.69 73.43,29.08 73.43,28.47 73.51,28.4 v73.51,19.94
  Bottom 0.152: v74.12,29.69 71.91,29.69 IC1.1 | v73.51,19.94 73.81,19.63 73.81,19.02 74.95,17.88 75.56,17.88 75.87,18.19 75.87,18.8 75.03,19.63 75.03,20.17 AC1.6
SDO1  (via drill 0.35)
  Top 0.152: 24.47,66.23 4.93,46.69 4.93,18.57 2.03,15.67 2.03,7.21 3.63,5.61 12.17,5.61 SV2.2 | 24.47,66.23 40.28,82.04 40.28,128.22 R15.2 | v85.4,31.29 85.4,25.5 84.1,24.21 83.49,24.21 83.34,24.36 81.81,24.36 U1.31 | 24.47,66.23 v33.58,57.12
  Bottom 0.152: v85.4,31.29 85.4,31.98 83.26,34.11 80.97,34.11 73.36,41.73 61.01,41.73 58.65,39.37 57.73,39.37 39.98,57.12 v33.58,57.12
SDO2  (via drill 0.35)
  Top 0.152: v79.45,29.77 79.22,29.54 79.22,28.47 U1.39
  Route15 0.152: v79.45,29.77 78.46,28.78 v74.04,28.78
  Bottom 0.152: 74.16,28.89 74.95,28.09 AC1.7 | 74.16,28.89 74.12,28.93 71.98,28.93 71.37,29.54 IC1.2 | 74.16,28.89 v74.04,28.78
U1RX  (via drill 0.35)
  Top 0.152: v77.24,16.81 77.24,19.79 U1.18
  Route15 0.152: I/O_MON.2 8.89,22.84 13.84,22.84 22.68,13.99 34.27,13.99 UART_POINTS.1 34.34,13.99 44.93,24.59 v49.96,24.59
  Bottom 0.152: v77.24,16.81 77.24,15.9 78.08,15.06 78.08,11.86 76.1,9.88 61.77,9.88 59.49,12.17 36.09,12.17 UART_POINTS.1 | v49.96,24.59 52.02,26.64 SV1.3
U1TX  (via drill 0.35)
  Top 0.152: v75.64,16.13 76.71,17.2 76.71,19.79 U1.17
  Route15 0.152: v68.56,16.66 61.09,24.13 SV1.2 52.02,24.13 41.89,13.99 36.86,13.99 UART_POINTS.2
  Bottom 0.152: v75.64,16.13 75.49,16.13 74.95,16.66 v68.56,16.66 | I/O_MON.3 8.89,25.35 10.57,25.35 20.17,15.75 35.03,15.75 36.78,13.99 UART_POINTS.2
U2RX  (via drill 0.35)
  Top 0.152: v59.49,13.31 60.17,13.31 61.01,14.15 74.35,14.15 74.57,13.92 78,13.92 80.59,16.51 80.59,20.78 80.52,20.85 79.98,20.85 79.76,20.62 79.76,19.86 U1.23
  Route15 0.152: I/O_MON.6 8.89,31.9 16.74,24.05 16.74,22.45 17.35,21.84 31.98,21.84 32.97,22.84 SV3.8
  Bottom 0.152: v59.49,13.31 49.89,13.31 38.53,24.66 34.8,24.66 33.05,22.91 SV3.8
U2TX
  Top 0.152: SV1.1 52.17,21.69 57.66,21.69 60.94,18.41 73.51,18.41 74.19,19.1 74.19,26.19 74.04,26.34 73.2,26.34 U1.2
  Bottom 0.152: I/O_MON.7 38.08,35.56 52.02,21.62 SV1.1
VDD  (via drill 0.35)
  Top 0.305: C40.1 58.27,133.32 58.27,128.29 C35.1 58.42,128.22 58.95,128.22 61.7,125.48 62.99,125.48 63.22,125.25 63.22,123.65 61.85,122.28 | SJ6.1 112.52,117.78 111.68,116.94 106.35,116.94 | 106.35,116.94 67.18,116.94 61.85,122.28 | 61.85,122.28 59.72,124.41 LCD2.30 59.56,124.41 58.65,123.5 48.74,123.5 47.83,124.41 46.99,124.41 LCD2.35 | C41.1 40.44,49.5 38.91,47.98 36.17,47.98 36.02,48.13 36.02,48.97 36.86,49.81 36.86,50.42 IC4.5 36.7,50.42 36.25,50.42 30.84,55.83 25.27,55.83 24.13,54.69 C42.1 L4.2 17.73,54.61 16.2,53.09 12.7,53.09 L5.2 12.62,52.93 12.62,52.48 10.07,49.92 | I/O_MON.4 3.3VTP.TP | 10.07,49.92 7.06,46.91 7.06,39.98 8.89,38.15 I/O_MON.8 | 98.73,5.77 104.83,5.77 3.3VDC.3 106.73,7.75 106.73,11.48 JP2.2 | 98.73,5.77 89.89,5.77 86.69,2.56 C7.1 | 98.73,5.77 v98.73,3.86 | OS1.4 46.99,16.13 44.86,16.13 38.15,22.84 SV3.10 38,22.76 37.77,22.76 36.02,21.01 35.1,21.01 34.49,21.62 34.49,24.13 39.9,29.54 40.06,29.54 42.11,31.6 42.11,32.89 43.1,33.88 C16.1 45.7,33.96 C17.1 45.85,34.04 51.79,34.04 52.02,34.27 SV1.6 | v77.32,30.99 77.24,30.91 77.24,28.47 U1.43 | v68.71,24.89 69.39,24.21 72.14,24.21 72.29,24.36 73.13,24.36 U1.6 | v56.52,32.13 56.52,29.54 57.43,28.63 57.43,27.94 R3.2 | IC2.3 48.06,4.47 45.47,4.47 42.04,7.9 C15.1 41.89,7.98 39.37,7.98 C14.1 39.29,7.82 38.23,6.76 v38.23,6.68 | v32.89,7.9 33.12,7.67 34.04,7.67 SJ2.1 | SV2.7 32.97,10.11 34.04,10.11 SJ1.1 34.11,10.26 34.11,10.57 35.41,11.86 OS1.1 | 58.27,8.05 59.94,6.38 61.24,6.38 C2.1 | 58.27,8.05 56.21,10.11 C18.1 | U1.26 81.74,21.84 80.37,21.84 79.22,20.7 79.22,19.86 U1.22 79.22,19.71 79.22,17.8 78.69,17.27 v78.69,15.52
  Top 0.305: v78.69,13 78.16,13 75.34,10.18 74.04,10.18 L1.2 73.89,10.18 72.59,11.48 62.61,11.48 61.32,10.18 C1.1 61.16,10.26 60.78,10.64 v60.1,10.64 | v58.34,8.13 58.27,8.05 | 106.35,116.94 106.35,44.09 105.82,43.56 104.98,43.56 104.14,44.4 IC3.3 | C28.1 15.6,40.66 15.6,44.4 C29.1 15.44,44.55 10.07,49.92
  Route15 0.305: JP5.4 3.86,15.29 3.86,22.91 I/O_MON.4 7.82,29.01 7.82,36.02 8.89,37.08 I/O_MON.8 | v70.61,32.13 v74.88,32.13 | v32.89,7.9 30.76,7.9 SV2.7 | v58.34,8.13 60.1,9.88 v60.1,10.64 60.17,10.72 63.6,10.72 69.24,16.36 69.24,23.22 68.71,23.75 v68.71,24.89 | v98.73,3.86 94.84,3.86 85.7,13 v78.69,13
  Bottom 0.305: v98.73,3.86 98.73,2.56 C19.1 | C22.1 113.97,2.49 112.9,1.42 111.3,1.42 109.86,2.87 109.86,4.47 106.73,7.59 3.3VDC.3 | IC3.3 104.14,31.75 JP2.2 | IC1.3 70.84,29.69 70.84,29.46 71.75,28.55 73.2,28.55 74.5,27.25 76.4,27.25 76.94,27.79 76.94,28.02 AC1.9 77.01,28.17 77.32,28.47 v77.32,30.99 77.24,31.06 75.95,31.06 v74.88,32.13 | 70.31,31.29 67.26,31.29 62.84,35.71 55.75,35.71 | 55.75,35.71 53.47,35.71 52.09,34.34 SV1.6 | 70.31,31.29 IC1.7 | 56.52,32.89 60.1,32.89 62.46,30.53 63.75,30.53 C4.1 63.91,30.38 68.71,25.58 v68.71,24.89 | 56.52,32.89 55.75,33.66 55.75,35.71 | 56.52,32.89 v56.52,32.13 | v70.61,32.13 70.61,31.83 70.31,31.52 70.31,31.29 | v32.89,7.9 36.4,7.9 37.62,6.68 v38.23,6.68 38.3,6.6 38.61,6.6 38.99,6.22 48.44,6.22 50.34,8.13 v58.34,8.13 | C5.1 79.98,13 v78.69,13 v78.69,15.52 | 3.3VTP.TP 20.09,27.94 24.28,23.75 24.28,21.69 24.97,21.01 36.25,21.01 SV3.10
VREF+  (via drill 0.35)
  Top 0.152: v72.59,20.24 73.13,20.78 73.13,21.31 U1.12
  Bottom 0.152: 59.72,18.95 59.72,13.99 60.71,13 61.24,13 U2.7 61.32,13 61.32,12.39 U2.6 61.39,12.32 62,12.32 64.14,10.18 74.57,10.18 77.09,12.7 C9.1 77.01,12.7 77.01,15.67 75.72,16.97 74.35,16.97 72.59,18.72 v72.59,20.24 | 59.72,18.95 59.72,29.46 C11.1 | VREF_TP.TP 43.03,27.94 52.02,18.95 59.72,18.95
VSS  (via drill 0.35)
  Top 0.305: 62.08,9.04 60.55,9.04 59.49,10.11 v59.33,10.11 58.12,10.11 C18.2 58.04,10.26 56.44,11.86 52.09,11.86 OS1.2 | 62.08,9.04 63.14,10.11 C1.2 | 63.14,7.98 63.14,6.38 C2.2 | 62.08,9.04 63.14,7.98 | C3.2 68.25,10.11 66.19,8.05 63.22,8.05 63.14,7.98 | 78.46,20.93 78.54,20.93 78.69,20.78 78.69,19.86 U1.21 | 78.46,20.93 76.4,20.93 76.25,20.78 76.25,19.86 U1.16 | 80.82,23.37 81.74,23.37 U1.29 81.89,23.37 83.11,23.37 83.19,23.44 84.1,23.44 v84.25,23.29 | 80.82,23.37 78.46,21.01 78.46,20.93 | 80.82,23.37 77.78,26.42 77.78,28.4 U1.42 | C42.2 v29.16,54.61 31.37,54.61 35.1,50.88 35.1,50.04 34.65,49.58 34.27,49.58 IC4.2 | 53.01,50.8 54.23,49.58 R19.2 | 53.01,50.8 48.13,50.8 46.91,49.58 C43.2 46.76,49.58 43.33,49.58 C41.2 | C6.2 59.41,30.53 59.41,37.31 60.1,38 LED1.C 60.25,38.15 60.25,40.59 LED2.C 60.4,40.59 61.62,41.81 69.93,41.81 72.37,39.37 JP1.2 | C35.2 61.09,128.29 61.09,133.32 C40.2 60.94,133.32 60.48,133.32 59.18,134.62 53.62,134.62 52.48,133.48 R14.1 52.32,133.32 52.32,128.68 51.94,128.29 C34.2 52.02,128.14 52.02,124.48 LCD2.33 | 38.23,9.88 37.31,9.88 37.08,10.11 SJ1.3 | 38.23,9.88 39.37,9.88 C14.2 39.45,9.8 41.89,9.8 C15.2 | C16.2 43.18,32.05 45.7,32.05 C17.2 45.85,31.98 51.79,31.98 52.02,31.75 SV1.5 | v111.76,131.72 LED4.C | v54.99,14.07 55.07,13.99 56.13,13.99 C23.2 | GND_POINTS.2 85.09,2.26 85.93,1.42 87.45,1.42 88.52,2.49 C7.2 | v49.43,5.69 48.13,5.69 IC2.2 | v71.83,24.89 73.13,24.89 U1.5 | v37.08,6.22 SJ2.3 | LS1.2 104.14,30.3 108.18,30.3 115.57,22.91 JP2.3 | v38.23,10.87 38.23,9.88 | v53.01,50.88 53.01,50.8 | C28.2 17.42,40.66 v17.42,42.57 17.42,44.4 C29.2
  Bottom 0.305: AC1.3 78,20.24 78,20.47 78.54,21.01 79.45,21.01 79.91,20.55 79.91,20.24 AC1.1 | AC1.3 78.08,20.09 78.08,19.79 80.06,17.8 80.06,14.99 C5.2 80.14,15.44 84.94,15.44 86,16.51 C13.2 | C10.2 69.85,24.82 | 69.85,24.82 69.85,25.12 65.73,29.23 65.73,30.45 C4.2 | U2.4 65.66,11.79 65.66,12.32 U2.3 65.81,12.39 66.42,12.39 66.73,12.7 v68.48,12.7 C8.2 70.31,12.62 71.3,11.63 72.9,11.63 73.97,12.7 C9.2 | C27.2 101.93,86.39 v101.93,89.59 C26.2 | C24.2 13.01,86.39 13.01,92.71 C25.2 12.93,92.79 11.33,92.79 5.08,99.03 S3.1 | AC1.11 78.99,28.09 79.91,28.09 AC1.12 80.06,28.09 83.64,28.09 84.71,29.16 C12.2 84.71,29.31 80.82,33.2 71.3,33.2 | C20.2 101.85,2.49 100.79,1.42 97.97,1.42 96.9,2.49 C19.2 96.75,2.64 96.06,2.64 92.41,6.3 87.68,6.3 GND_POINTS.1 | 71.3,31.29 70.92,31.29 IC1.8 | 71.3,31.29 IC1.9 | 71.3,33.2 71.3,38.3 72.37,39.37 JP1.2 | 71.3,33.2 71.3,31.29 | C21.2 106.96,2.56 106.96,4.77 104.14,7.59 3.3VDC.2 | C22.2 112.14,2.56 112.14,2.87 115.57,6.3 JP6.1 | C11.2 59.64,31.45 52.4,31.45 52.09,31.75 SV1.5 | 69.85,24.82 71.75,24.82 v71.83,24.89 71.91,24.82 73.66,24.82 77.93,20.55 AC1.3
  pour Route2: 1.27,64.77 119.38,64.77 119.38,0 1.27,0
  pour Route2: 2.54,142.24 2.54,1.27 118.11,1.27 118.11,142.24

## Text on the board
Top: NSASPOOK@NSASPOOK.COM | CAN-FD ON | PIC32MK-CANFD HOST V1.7